# Altium PCB Arduino NG Ahuratus-PCB.PcbDoc (part 5 of 6)
Units mm, origin at the board's own origin, x right, y up, seen from the top; angles counter-clockwise.
Board outline 69 x 53.5 mm, 2 copper layers (Top Layer, Bottom Layer); 37 components, 49 nets, 193 pads, 40 vias.
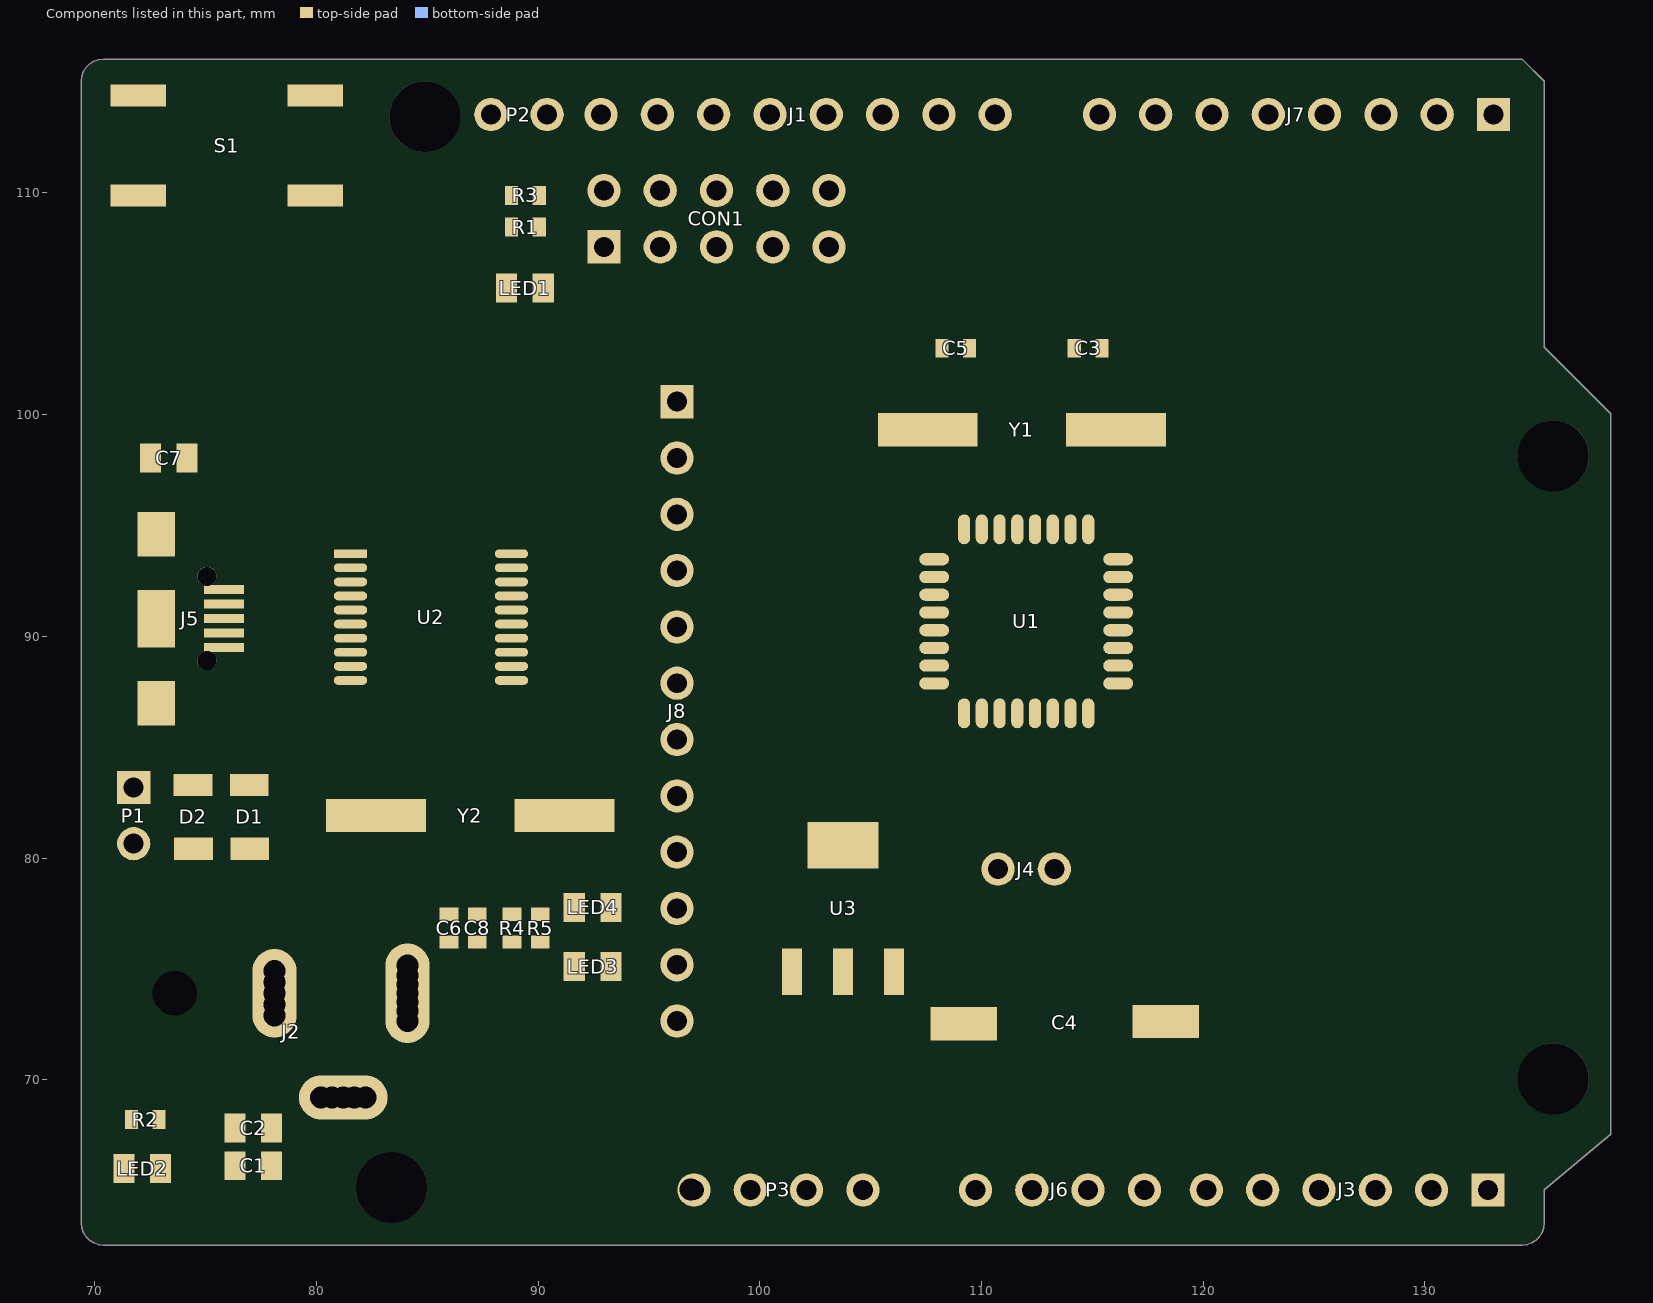
[diagram p5: the components of this part, seen from the top]

## Via types
v1: diameter 1.27, hole 0.711, Top Layer to Bottom Layer, 40 vias

## Nets (pads, with @x,y where several pads share a name; then routed paths per layer and width w, separated by ;. In a path a pad name is that pad's centre, name@x,y a point inside that pad or via, vN(x,y) a via of type N, cw(c..) or ccw(c..) an arc to the next point about the centre after c; other vN are vias at no path point) (continued)
copper on no net: (continued)
  Bottom Layer w0.051: 116.383,102.972 117.551,102.972 ; 116.383,103.022 117.551,103.022 ; 116.383,103.073 117.5,103.073 ; 116.383,103.124 117.5,103.124 ; 116.383,103.175 117.5,103.175 ; 116.383,103.226 117.5,103.226 ; 116.383,103.276 117.551,103.276 ; 116.383,103.327 117.551,103.327 ; 116.434,98.095 116.942,98.095 ; 116.434,98.146 116.942,98.146 ; 116.434,98.196 116.891,98.196 ; 116.434,98.247 116.891,98.247 ; 116.434,98.298 116.891,98.298 ; 116.434,98.349 116.891,98.349 ; 116.434,98.4 116.891,98.4 ; 116.434,98.45 116.891,98.45 ; 116.434,98.501 116.891,98.501 ; 116.434,98.552 116.891,98.552 ; 116.434,98.603 116.891,98.603 ; 116.434,98.654 116.891,98.654 ; 116.434,98.704 116.891,98.704 ; 116.434,98.755 116.891,98.755 ; 116.434,98.806 116.891,98.806 ; 116.434,98.857 116.942,98.857 ; 116.434,98.908 116.942,98.908 ; 116.434,98.958 116.942,98.958 ; 116.434,102.565 117.602,102.565 ; 116.434,102.616 117.602,102.616 ; 116.434,102.667 117.551,102.667 ; 116.434,102.718 117.551,102.718 ; 116.434,102.768 117.551,102.768 ; 116.434,102.819 117.551,102.819 ; 116.434,102.87 117.551,102.87 ; 116.434,102.921 117.551,102.921 ; 116.434,103.378 117.551,103.378 ; 116.434,103.429 117.551,103.429 ; 116.434,103.48 117.551,103.48 ; 116.434,103.53 117.551,103.53 ; 116.434,103.581 117.551,103.581 ; 116.434,103.632 117.602,103.632 ; 116.434,103.683 117.602,103.683 ; 116.484,97.942 116.992,97.942 ; 116.484,97.993 116.992,97.993 ; 116.484,98.044 116.942,98.044 ; 116.484,99.009 116.992,99.009 ; 116.484,99.06 116.992,99.06 ; 116.484,102.362 117.704,102.362 ; 116.484,102.413 117.653,102.413 ; 116.484,102.464 117.653,102.464 ; 116.484,102.514 117.602,102.514 ; 116.484,103.734 117.602,103.734 ; 116.484,103.784 117.653,103.784 ; 116.484,103.835 117.653,103.835 ; 116.484,103.886 117.704,103.886 ; 116.535,97.841 117.145,97.841 ; 116.535,97.892 117.043,97.892 ; 116.535,99.111 117.043,99.111 ; 116.535,99.162 117.145,99.162 ; 116.535,102.21 117.754,102.21 ; 116.535,102.26 117.754,102.26 ; 116.535,102.311 117.704,102.311 ; 116.535,103.937 117.704,103.937 ; 116.535,103.988 117.704,103.988 ; 116.535,104.038 117.754,104.038 ; 116.586,97.79 118.008,97.79 ; 116.586,99.212 117.958,99.212 ; 116.586,99.263 117.958,99.263 ; 116.586,102.057 117.856,102.057 ; 116.586,102.108 117.805,102.108 ; 116.586,102.159 117.805,102.159 ; 116.586,104.089 117.805,104.089 ; 116.586,104.14 117.805,104.14 ; 116.586,104.191 117.856,104.191 ; 116.637,97.739 117.958,97.739 ; 116.637,99.314 117.907,99.314 ; 116.637,101.956 117.907,101.956 ; 116.637,102.006 117.907,102.006 ; 116.637,104.242 117.907,104.242 ; 116.637,104.292 117.907,104.292 ; 116.637,104.343 117.958,104.343 ; 116.688,97.688 117.958,97.688 ; 116.688,99.365 117.856,99.365 ; 116.688,101.854 118.008,101.854 ; 116.688,101.905 117.958,101.905 ; 116.688,104.394 118.008,104.394 ; 116.688,104.445 118.059,104.445 ; 116.738,97.638 117.907,97.638 ; 116.738,99.416 117.805,99.416 ; 116.738,101.752 118.11,101.752 ; 116.738,101.803 118.059,101.803 ; 116.738,104.496 118.11,104.496 ; 116.789,97.587 117.805,97.587 ; 116.789,99.466 117.704,99.466 ; 116.789,101.651 118.212,101.651 ; 116.789,101.702 118.161,101.702 ; 116.789,104.546 118.161,104.546 ; 116.789,104.597 118.212,104.597 ; 116.84,97.536 117.754,97.536 ; 116.84,101.549 118.364,101.549 ; 116.84,101.6 118.313,101.6 ; 116.84,104.648 118.262,104.648 ; 116.84,104.699 118.364,104.699 ; 116.891,99.517 117.602,99.517 ; 116.891,101.498 118.466,101.498 ; 116.891,104.75 118.415,104.75 ; 116.942,97.485 117.653,97.485 ; 116.942,101.397 118.618,101.397 ; 116.942,101.448 118.516,101.448 ; 116.942,104.8 118.516,104.8 ; 116.942,104.851 118.618,104.851 ; 116.992,101.346 118.72,101.346 ; 116.992,104.902 118.72,104.902 ; 117.043,101.295 118.872,101.295 ; 117.043,104.953 118.872,104.953 ; 117.094,99.568 117.45,99.568 ; 117.094,101.194 119.38,101.194 ; 117.094,101.244 119.075,101.244 ; 117.094,105.004 119.024,105.004 ; 117.094,105.054 119.38,105.054 ; 117.145,97.434 117.45,97.434 ; 117.145,101.143 122.123,101.143 ; 117.145,105.105 122.123,105.105 ; 117.196,101.092 122.072,101.092 ; 117.196,105.156 122.072,105.156 ; 117.246,101.041 122.022,101.041 ; 117.246,105.207 122.022,105.207 ; 117.297,100.99 121.971,100.99 ; 117.297,105.258 121.971,105.258 ; 117.348,100.94 121.92,100.94 ; 117.348,105.308 121.92,105.308 ; 117.399,100.889 121.869,100.889 ; 117.399,105.359 121.869,105.359 ; 117.45,97.841 118.008,97.841 ; 117.45,99.162 118.008,99.162 ; 117.45,100.838 121.818,100.838 ; 117.45,105.41 121.768,105.41 ; 117.5,97.892 118.059,97.892 ; 117.5,99.111 118.059,99.111 ; 117.551,97.942 118.059,97.942 ; 117.551,99.06 118.059,99.06 ; 117.551,100.787 121.717,100.787 ; 117.551,105.461 121.717,105.461 ; 117.602,97.993 118.11,97.993 ; 117.602,98.044 118.11,98.044 ; 117.602,98.958 118.11,98.958 ; 117.602,99.009 118.059,99.009 ; 117.602,100.736 121.666,100.736 ; 117.602,105.512 121.666,105.512 ; 117.653,98.095 118.11,98.095 ; 117.653,98.146 118.11,98.146 ; 117.653,98.196 118.161,98.196 ; 117.653,98.247 118.161,98.247 ; 117.653,98.755 118.161,98.755 ; 117.653,98.806 118.11,98.806 ; 117.653,98.857 118.11,98.857 ; 117.653,98.908 118.11,98.908 ; 117.653,100.686 121.615,100.686 ; 117.653,105.562 121.564,105.562 ; 117.704,98.298 118.161,98.298 ; 117.704,98.349 118.161,98.349 ; 117.704,98.4 118.161,98.4 ; 117.704,98.45 118.161,98.45 ; 117.704,98.501 118.161,98.501 ; 117.704,98.552 118.161,98.552 ; 117.704,98.603 118.161,98.603 ; 117.704,98.654 118.161,98.654 ; 117.704,98.704 118.161,98.704 ; 117.754,100.635 121.514,100.635 ; 117.754,105.613 121.514,105.613 ; 117.805,100.584 121.463,100.584 ; 117.805,105.664 121.412,105.664 ; 117.907,100.533 121.361,100.533 ; 117.907,105.715 121.361,105.715 ; 117.958,105.766 121.26,105.766 ; 118.008,100.482 121.31,100.482 ; 118.059,100.432 121.209,100.432 ; 118.059,105.816 121.158,105.816 ; 118.161,100.381 121.107,100.381 ; 118.161,105.867 121.056,105.867 ; 118.262,105.918 120.955,105.918 ; 118.313,97.485 118.872,97.485 ; 118.313,97.536 118.872,97.536 ; 118.313,97.587 118.872,97.587 ; 118.313,97.638 118.923,97.638 ; 118.313,97.688 118.923,97.688 ; 118.313,97.739 118.974,97.739 ; 118.313,97.79 118.974,97.79 ; 118.313,97.841 119.024,97.841 ; 118.313,97.892 119.024,97.892 ; 118.313,97.942 119.075,97.942 ; 118.313,97.993 119.075,97.993 ; 118.313,98.044 119.126,98.044 ; 118.313,98.095 119.126,98.095 ; 118.313,98.146 119.177,98.146 ; 118.313,98.196 119.177,98.196 ; 118.313,98.247 118.72,98.247 ; 118.313,98.298 118.72,98.298 ; 118.313,98.349 118.72,98.349 ; 118.313,98.4 118.72,98.4 ; 118.313,98.45 118.72,98.45 ; 118.313,98.501 118.72,98.501 ; 118.313,98.552 118.72,98.552 ; 118.313,98.603 118.72,98.603 ; 118.313,98.654 118.72,98.654 ; 118.313,98.704 118.72,98.704 ; 118.313,98.755 118.72,98.755 ; 118.313,98.806 118.72,98.806 ; 118.313,98.857 118.72,98.857 ; 118.313,98.908 118.72,98.908 ; 118.313,98.958 118.72,98.958 ; 118.313,99.009 118.72,99.009 ; 118.313,99.06 118.72,99.06 ; 118.313,99.111 118.72,99.111 ; 118.313,99.162 118.72,99.162 ; 118.313,99.212 118.72,99.212 ; 118.313,99.263 118.72,99.263 ; 118.313,99.314 118.72,99.314 ; 118.313,99.365 118.72,99.365 ; 118.313,99.416 118.72,99.416 ; 118.313,99.466 118.72,99.466 ; 118.313,99.517 118.72,99.517 ; 118.313,100.33 121.006,100.33 ; 118.415,100.279 120.853,100.279 ; 118.415,105.969 120.802,105.969 ; 118.567,100.228 120.752,100.228 ; 118.567,106.02 120.65,106.02 ; 118.72,100.178 120.548,100.178 ; 118.72,106.07 120.498,106.07 ; 118.77,98.247 119.228,98.247 ; 118.77,98.298 119.228,98.298 ; 118.77,102.87 120.65,102.87 ; 118.77,102.921 120.65,102.921 ; 118.77,102.972 120.65,102.972 ; 118.77,103.022 120.65,103.022 ; 118.77,103.073 120.65,103.073 ; 118.77,103.124 120.65,103.124 ; 118.77,103.175 120.65,103.175 ; 118.77,103.226 120.65,103.226 ; 118.77,103.276 120.65,103.276 ; 118.77,103.327 120.65,103.327 ; 118.77,103.378 120.65,103.378 ; 118.77,103.429 120.65,103.429 ; 118.77,103.48 120.65,103.48 ; 118.77,103.53 120.65,103.53 ; 118.821,98.349 119.228,98.349 ; 118.821,98.4 119.278,98.4 ; 118.872,98.45 119.278,98.45 ; 118.872,98.501 119.329,98.501 ; 118.872,98.552 119.329,98.552 ; 118.923,98.603 119.38,98.603 ; 118.923,98.654 119.38,98.654 ; 118.923,106.121 120.244,106.121 ; 118.974,98.704 119.431,98.704 ; 118.974,98.755 119.431,98.755 ; 118.974,100.127 120.345,100.127 ; 119.024,98.806 119.888,98.806 ; 119.024,98.857 119.888,98.857 ; 119.075,98.908 119.888,98.908 ; 119.075,98.958 119.888,98.958 ; 119.126,99.009 119.888,99.009 ; 119.126,99.06 119.888,99.06 ; 119.177,99.111 119.888,99.111 ; 119.177,99.162 119.888,99.162 ; 119.228,99.212 119.888,99.212 ; 119.228,99.263 119.888,99.263 ; 119.228,99.314 119.888,99.314 ; 119.278,99.365 119.888,99.365 ; 119.278,99.416 119.888,99.416 ; 119.278,106.172 119.888,106.172 ; 119.329,99.466 119.888,99.466 ; 119.329,99.517 119.888,99.517 ; 119.38,100.076 119.99,100.076 ; 119.38,102.311 120.091,102.311 ; 119.38,102.362 120.091,102.362 ; 119.38,102.413 120.091,102.413 ; 119.38,102.464 120.091,102.464 ; 119.38,102.514 120.091,102.514 ; 119.38,102.565 120.091,102.565 ; 119.38,102.616 120.091,102.616 ; 119.38,102.667 120.091,102.667 ; 119.38,102.718 120.091,102.718 ; 119.38,102.768 120.091,102.768 ; 119.38,102.819 120.091,102.819 ; 119.38,103.581 120.091,103.581 ; 119.38,103.632 120.091,103.632 ; 119.38,103.683 120.091,103.683 ; 119.38,103.734 120.091,103.734 ; 119.38,103.784 120.091,103.784 ; 119.38,103.835 120.091,103.835 ; 119.38,103.886 120.091,103.886 ; 119.38,103.937 120.091,103.937 ; 119.38,103.988 120.091,103.988 ; 119.38,104.038 120.091,104.038 ; 119.38,104.089 120.091,104.089 ; 119.38,104.14 120.091,104.14 ; 119.482,97.485 119.888,97.485 ; 119.482,97.536 119.888,97.536 ; 119.482,97.587 119.888,97.587 ; 119.482,97.638 119.888,97.638 ; 119.482,97.688 119.888,97.688 ; 119.482,97.739 119.888,97.739 ; 119.482,97.79 119.888,97.79 ; 119.482,97.841 119.888,97.841 ; 119.482,97.892 119.888,97.892 ; 119.482,97.942 119.888,97.942 ; 119.482,97.993 119.888,97.993 ; 119.482,98.044 119.888,98.044 ; 119.482,98.095 119.888,98.095 ; 119.482,98.146 119.888,98.146 ; 119.482,98.196 119.888,98.196 ; 119.482,98.247 119.888,98.247 ; 119.482,98.298 119.888,98.298 ; 119.482,98.349 119.888,98.349 ; 119.482,98.4 119.888,98.4 ; 119.482,98.45 119.888,98.45 ; 119.482,98.501 119.888,98.501 ; 119.482,98.552 119.888,98.552 ; 119.482,98.603 119.888,98.603 ; 119.482,98.654 119.888,98.654 ; 119.482,98.704 119.888,98.704 ; 119.482,98.755 119.888,98.755 ; 119.786,105.054 122.174,105.054 ; 119.99,101.194 122.174,101.194 ; 120.142,105.004 122.225,105.004 ; 120.244,97.485 121.615,97.485 ; 120.244,97.536 121.615,97.536 ; 120.244,97.587 121.615,97.587 ; 120.244,97.638 121.615,97.638 ; 120.244,97.688 121.615,97.688 ; 120.244,97.739 121.615,97.739 ; 120.244,97.79 121.615,97.79 ; 120.244,99.212 121.615,99.212 ; 120.244,99.263 121.615,99.263 ; 120.244,99.314 121.615,99.314 ; 120.244,99.365 121.615,99.365 ; 120.244,99.416 121.615,99.416 ; 120.244,99.466 121.615,99.466 ; 120.244,99.517 121.615,99.517 ; 120.244,101.244 122.225,101.244 ; 120.345,104.953 122.276,104.953 ; 120.447,101.295 122.276,101.295 ; 120.498,104.902 122.326,104.902 ; 120.548,101.346 122.276,101.346 ; 120.599,104.851 122.377,104.851 ; 120.65,101.397 122.326,101.397 ; 120.701,97.841 121.158,97.841 ; 120.701,97.892 121.158,97.892 ; 120.701,97.942 121.158,97.942 ; 120.701,97.993 121.158,97.993 ; 120.701,98.044 121.158,98.044 ; 120.701,98.095 121.158,98.095 ; 120.701,98.146 121.158,98.146 ; 120.701,98.196 121.158,98.196 ; 120.701,98.247 121.158,98.247 ; 120.701,98.298 121.158,98.298 ; 120.701,98.349 121.158,98.349 ; 120.701,98.4 121.158,98.4 ; 120.701,98.45 121.158,98.45 ; 120.701,98.501 121.158,98.501 ; 120.701,98.552 121.158,98.552 ; 120.701,98.603 121.158,98.603 ; 120.701,98.654 121.158,98.654 ; 120.701,98.704 121.158,98.704 ; 120.701,98.755 121.158,98.755 ; 120.701,98.806 121.158,98.806 ; 120.701,98.857 121.158,98.857 ; 120.701,98.908 121.158,98.908 ; 120.701,98.958 121.158,98.958 ; 120.701,99.009 121.158,99.009 ; 120.701,99.06 121.158,99.06 ; 120.701,99.111 121.158,99.111 ; 120.701,99.162 121.158,99.162 ; 120.701,104.8 122.428,104.8 ; 120.752,101.448 122.377,101.448 ; 120.802,104.75 122.428,104.75 ; 120.853,101.498 122.428,101.498 ; 120.853,104.699 122.479,104.699 ; 120.904,101.549 122.479,101.549 ; 120.955,101.6 122.479,101.6 ; 120.955,104.648 122.53,104.648 ; 121.006,104.597 122.58,104.597 ; 121.056,101.651 122.53,101.651 ; 121.107,101.702 122.58,101.702 ; 121.107,104.546 122.631,104.546 ; 121.158,101.752 122.631,101.752 ; 121.158,104.496 122.631,104.496 ; 121.209,101.803 122.631,101.803 ; 121.209,104.445 122.682,104.445 ; 121.26,101.854 122.682,101.854 ; 121.26,104.394 122.733,104.394 ; 121.31,101.905 122.733,101.905 ; 121.31,104.343 122.784,104.343 ; 121.361,101.956 122.733,101.956 ; 121.361,104.292 122.784,104.292 ; 121.412,102.006 122.784,102.006 ; 121.412,102.057 122.834,102.057 ; 121.412,104.242 122.834,104.242 ; 121.463,102.108 122.834,102.108 ; 121.463,104.191 124.257,104.191 ; 121.514,102.159 124.206,102.159 ; 121.514,104.14 124.206,104.14 ; 121.564,102.21 124.155,102.21 ; 121.564,104.089 124.155,104.089 ; 121.615,102.26 124.104,102.26 ; 121.615,102.311 124.104,102.311 ; 121.615,103.988 124.104,103.988 ; 121.615,104.038 124.104,104.038 ; 121.666,102.362 124.054,102.362 ; 121.666,103.937 124.054,103.937 ; 121.717,102.413 124.003,102.413 ; 121.717,103.886 124.003,103.886 ; 121.768,102.464 123.952,102.464 ; 121.768,102.514 123.952,102.514 ; 121.768,103.784 123.952,103.784 ; 121.768,103.835 123.952,103.835 ; 121.818,102.565 123.901,102.565 ; 121.818,103.734 123.901,103.734 ; 121.869,102.616 123.85,102.616 ; 121.869,102.667 123.85,102.667 ; 121.869,103.683 123.85,103.683 ; 121.92,102.718 123.8,102.718 ; 121.92,103.581 123.8,103.581 ; 121.92,103.632 123.85,103.632 ; 121.971,97.942 122.428,97.942 ; 121.971,97.993 122.428,97.993 ; 121.971,98.044 122.428,98.044 ; 121.971,98.095 122.428,98.095 ; 121.971,98.146 122.428,98.146 ; 121.971,98.196 122.428,98.196 ; 121.971,98.247 122.428,98.247 ; 121.971,98.298 122.428,98.298 ; 121.971,98.349 122.428,98.349 ; 121.971,98.4 122.428,98.4 ; 121.971,98.45 122.428,98.45 ; 121.971,98.501 122.428,98.501 ; 121.971,98.552 122.428,98.552 ; 121.971,98.603 122.428,98.603 ; 121.971,98.654 122.428,98.654 ; 121.971,98.704 122.428,98.704 ; 121.971,98.755 122.428,98.755 ; 121.971,98.806 122.428,98.806 ; 121.971,98.857 122.428,98.857 ; 121.971,98.908 122.428,98.908 ; 121.971,98.958 122.428,98.958 ; 121.971,99.009 122.428,99.009 ; 121.971,99.06 122.428,99.06 ; 121.971,99.111 122.428,99.111 ; 121.971,99.162 122.428,99.162 ; 121.971,99.212 122.428,99.212 ; 121.971,99.263 122.428,99.263 ; 121.971,99.314 122.428,99.314 ; 121.971,99.365 122.428,99.365 ; 121.971,99.416 122.428,99.416 ; 121.971,99.466 122.428,99.466 ; 121.971,99.517 122.428,99.517 ; 121.971,102.768 123.749,102.768 ; 121.971,102.819 123.749,102.819 ; 121.971,103.53 123.749,103.53 ; 122.022,97.841 122.53,97.841 ; 122.022,97.892 122.479,97.892 ; 122.022,102.87 123.698,102.87 ; 122.022,102.921 123.698,102.921 ; 122.022,103.429 123.698,103.429 ; 122.022,103.48 123.698,103.48 ; 122.072,97.739 123.444,97.739 ; 122.072,97.79 123.495,97.79 ; 122.072,102.972 123.647,102.972 ; 122.072,103.378 123.647,103.378 ; 122.123,97.688 123.444,97.688 ; 122.123,103.022 123.596,103.022 ; 122.123,103.073 123.596,103.073 ; 122.123,103.276 123.596,103.276 ; 122.123,103.327 123.647,103.327 ; 122.174,97.638 123.393,97.638 ; 122.174,103.124 123.546,103.124 ; 122.174,103.175 123.546,103.175 ; 122.174,103.226 123.546,103.226 ; 122.225,97.587 123.342,97.587 ; 122.276,97.536 123.241,97.536 ; 122.377,97.485 123.139,97.485 ; 122.58,97.434 122.936,97.434 ; 122.885,102.057 124.308,102.057 ; 122.885,102.108 124.257,102.108 ; 122.885,104.242 124.308,104.242 ; 122.936,102.006 124.308,102.006 ; 122.936,104.292 124.358,104.292 ; 122.936,104.343 124.409,104.343 ; 122.987,97.841 123.495,97.841 ; 122.987,101.905 124.409,101.905 ; 122.987,101.956 124.358,101.956 ; 122.987,104.394 124.46,104.394 ; 123.038,97.892 123.495,97.892 ; 123.038,97.942 123.546,97.942 ; 123.038,101.854 124.46,101.854 ; 123.038,104.445 124.511,104.445 ; 123.088,97.993 123.546,97.993 ; 123.088,98.044 123.546,98.044 ; 123.088,98.095 123.546,98.095 ; 123.088,98.146 123.546,98.146 ; 123.088,98.196 123.546,98.196 ; 123.088,98.247 123.546,98.247 ; 123.088,98.298 123.546,98.298 ; 123.088,98.349 123.546,98.349 ; 123.088,98.4 123.546,98.4 ; 123.088,98.45 123.546,98.45 ; 123.088,98.501 123.546,98.501 ; 123.088,98.552 123.546,98.552 ; 123.088,98.603 123.546,98.603 ; 123.088,98.654 123.546,98.654 ; 123.088,98.704 123.546,98.704 ; 123.088,98.755 123.546,98.755 ; 123.088,98.806 123.546,98.806 ; 123.088,98.857 123.546,98.857 ; 123.088,98.908 123.546,98.908 ; 123.088,98.958 123.546,98.958 ; 123.088,99.009 123.546,99.009 ; 123.088,99.06 123.546,99.06 ; 123.088,99.111 123.546,99.111 ; 123.088,99.162 123.546,99.162 ; 123.088,99.212 123.546,99.212 ; 123.088,99.263 123.546,99.263 ; 123.088,99.314 123.546,99.314 ; 123.088,99.365 123.546,99.365 ; 123.088,99.416 123.546,99.416 ; 123.088,99.466 123.546,99.466 ; 123.088,99.517 123.546,99.517 ; 123.088,101.752 124.562,101.752 ; 123.088,101.803 124.511,101.803 ; 123.088,104.496 124.562,104.496 ; 123.088,104.546 124.663,104.546 ; 123.139,101.702 124.612,101.702 ; 123.139,104.597 124.714,104.597 ; 123.19,101.651 124.663,101.651 ; 123.19,104.648 124.765,104.648 ; 123.241,101.549 124.816,101.549 ; 123.241,101.6 124.765,101.6 ; 123.241,104.699 124.866,104.699 ; 123.292,101.498 124.866,101.498 ; 123.292,104.75 124.917,104.75 ; 123.292,104.8 125.019,104.8 ; 123.342,101.448 124.968,101.448 ; 123.342,104.851 125.12,104.851 ; 123.393,101.397 125.07,101.397 ; 123.393,104.902 125.222,104.902 ; 123.444,101.295 125.273,101.295 ; 123.444,101.346 125.171,101.346 ; 123.444,104.953 125.374,104.953 ; 123.495,101.244 125.476,101.244 ; 123.495,105.004 125.578,105.004 ; 123.546,101.194 125.73,101.194 ; 123.546,105.054 125.933,105.054 ; 123.596,101.143 128.575,101.143 ; 123.596,105.105 128.575,105.105 ; 123.647,101.092 128.524,101.092 ; 123.647,105.156 128.524,105.156 ; 123.698,101.041 128.473,101.041 ; 123.698,105.207 128.473,105.207 ; 123.749,98.146 124.257,98.146 ; 123.749,98.196 124.257,98.196 ; 123.749,98.247 124.206,98.247 ; 123.749,98.298 124.206,98.298 ; 123.749,98.349 124.206,98.349 ; 123.749,98.4 124.206,98.4 ; 123.749,98.45 124.206,98.45 ; 123.749,98.501 124.206,98.501 ; 123.749,98.552 124.206,98.552 ; 123.749,98.603 124.206,98.603 ; 123.749,98.654 124.206,98.654 ; 123.749,98.704 124.206,98.704 ; 123.749,98.755 124.206,98.755 ; 123.749,98.806 124.257,98.806 ; 123.749,98.857 124.257,98.857 ; 123.749,98.908 124.257,98.908 ; 123.749,100.99 128.422,100.99 ; 123.749,105.258 128.422,105.258 ; 123.8,97.993 124.358,97.993 ; 123.8,98.044 124.308,98.044 ; 123.8,98.095 124.257,98.095 ; 123.8,98.958 124.308,98.958 ; 123.8,99.009 124.308,99.009 ; 123.8,99.06 124.358,99.06 ; 123.8,100.94 128.372,100.94 ; 123.8,105.308 128.372,105.308 ; 123.85,97.942 124.409,97.942 ; 123.85,99.111 124.46,99.111 ; 123.85,99.162 124.562,99.162 ; 123.85,100.889 128.321,100.889 ; 123.85,105.359 128.321,105.359 ; 123.901,97.841 124.612,97.841 ; 123.901,97.892 124.46,97.892 ; 123.901,99.212 125.374,99.212 ; 123.901,100.838 128.27,100.838 ; 123.952,97.79 125.374,97.79 ; 123.952,99.263 125.374,99.263 ; 123.952,105.41 128.27,105.41 ; 124.003,97.739 125.374,97.739 ; 124.003,99.314 125.374,99.314 ; 124.003,100.787 128.168,100.787 ; 124.003,105.461 128.219,105.461 ; 124.054,97.688 125.374,97.688 ; 124.054,99.365 125.374,99.365 ; 124.054,100.736 128.118,100.736 ; 124.054,105.512 128.118,105.512 ; 124.104,97.638 125.374,97.638 ; 124.104,100.686 128.067,100.686 ; 124.155,99.416 125.374,99.416 ; 124.155,105.562 128.067,105.562 ; 124.206,97.587 125.374,97.587 ; 124.206,99.466 125.374,99.466 ; 124.206,100.635 127.965,100.635 ; 124.206,105.613 127.965,105.613 ; 124.257,100.584 127.914,100.584 ; 124.308,97.536 125.374,97.536 ; 124.308,105.664 127.914,105.664 ; 124.358,100.533 127.813,100.533 ; 124.358,105.715 127.864,105.715 ; 124.409,99.517 125.374,99.517 ; 124.409,100.482 127.711,100.482 ; 124.46,105.766 127.762,105.766 ; 124.511,97.485 125.374,97.485 ; 124.511,100.432 127.66,100.432 ; 124.562,105.816 127.66,105.816 ; 124.612,100.381 127.559,100.381 ; 124.663,105.867 127.559,105.867 ; 124.714,100.33 127.406,100.33 ; 124.765,105.918 127.457,105.918 ; 124.866,100.279 127.305,100.279 ; 124.917,97.841 125.374,97.841 ; 124.917,97.892 125.374,97.892 ; 124.917,97.942 125.374,97.942 ; 124.917,97.993 125.374,97.993 ; 124.917,98.044 125.374,98.044 ; 124.917,98.095 125.374,98.095 ; 124.917,98.146 125.374,98.146 ; 124.917,98.196 125.374,98.196 ; 124.917,98.247 125.374,98.247 ; 124.917,98.298 125.374,98.298 ; 124.917,98.349 125.374,98.349 ; 124.917,98.4 125.374,98.4 ; 124.917,98.45 125.374,98.45 ; 124.917,98.501 125.374,98.501 ; 124.917,98.552 125.374,98.552 ; 124.917,98.603 125.374,98.603 ; 124.917,98.654 125.374,98.654 ; 124.917,98.704 125.374,98.704 ; 124.917,98.755 125.374,98.755 ; 124.917,98.806 125.374,98.806 ; 124.917,98.857 125.374,98.857 ; 124.917,98.908 125.374,98.908 ; 124.917,98.958 125.374,98.958 ; 124.917,99.009 125.374,99.009 ; 124.917,99.06 125.374,99.06 ; 124.917,99.111 125.374,99.111 ; 124.917,99.162 125.374,99.162 ; 124.917,105.969 127.305,105.969 ; 124.968,100.228 127.152,100.228 ; 125.07,102.921 127.051,102.921 ; 125.07,102.972 127.051,102.972 ; 125.07,103.022 127.051,103.022 ; 125.07,103.073 127.051,103.073 ; 125.07,103.124 127.051,103.124 ; 125.07,103.175 127.051,103.175 ; 125.07,103.226 127.051,103.226 ; 125.07,103.276 127.051,103.276 ; 125.07,103.327 127.051,103.327 ; 125.07,103.378 127.051,103.378 ; 125.07,103.429 127.051,103.429 ; 125.07,103.48 127.051,103.48 ; 125.07,106.02 127.152,106.02 ; 125.12,103.53 127.051,103.53 ; 125.171,100.178 127,100.178 ; 125.222,106.07 127,106.07 ; 125.374,100.127 126.746,100.127 ; 125.476,106.121 126.797,106.121 ; 125.527,97.485 126.086,97.485 ; 125.578,97.536 126.086,97.536 ; 125.578,97.587 126.086,97.587 ; 125.628,97.638 126.136,97.638 ; 125.628,97.688 126.136,97.688 ; 125.679,97.739 126.187,97.739 ; 125.679,97.79 126.187,97.79 ; 125.679,98.857 126.187,98.857 ; 125.679,98.908 126.187,98.908 ; 125.679,98.958 126.187,98.958 ; 125.679,99.009 126.187,99.009 ; 125.679,99.06 126.187,99.06 ; 125.679,99.111 126.238,99.111 ; 125.73,97.841 126.238,97.841 ; 125.73,97.892 126.238,97.892 ; 125.73,98.704 126.289,98.704 ; 125.73,98.755 126.238,98.755 ; 125.73,98.806 126.187,98.806 ; 125.73,99.162 126.34,99.162 ; 125.73,99.212 127.152,99.212 ; 125.73,100.076 126.34,100.076 ; 125.781,97.942 126.289,97.942 ; 125.781,97.993 126.289,97.993 ; 125.781,98.654 126.441,98.654 ; 125.781,99.263 127.152,99.263 ; 125.781,99.314 127.152,99.314 ; 125.832,98.044 126.34,98.044 ; 125.832,98.095 126.34,98.095 ; 125.832,98.603 127.152,98.603 ; 125.832,99.365 127.152,99.365 ; 125.832,106.172 126.441,106.172 ; 125.882,98.146 126.34,98.146 ; 125.882,98.196 126.39,98.196 ; 125.882,98.552 127.152,98.552 ; 125.933,98.247 126.441,98.247 ; 125.933,98.298 126.644,98.298 ; 125.933,98.501 127.152,98.501 ; 125.933,99.416 127.152,99.416 ; 125.984,98.349 127.152,98.349 ; 125.984,99.466 127.152,99.466 ; 126.035,98.4 127.152,98.4 ; 126.086,98.45 127.152,98.45 ; 126.136,99.517 127.152,99.517 ; 126.34,101.194 128.626,101.194 ; 126.34,105.054 128.626,105.054 ; 126.644,101.244 128.626,101.244 ; 126.695,97.485 127.102,97.485 ; 126.695,97.536 127.152,97.536 ; 126.695,97.587 127.152,97.587 ; 126.695,97.638 127.152,97.638 ; 126.695,97.688 127.152,97.688 ; 126.695,97.739 127.152,97.739 ; 126.695,97.79 127.152,97.79 ; 126.695,97.841 127.152,97.841 ; 126.695,97.892 127.152,97.892 ; 126.695,97.942 127.152,97.942 ; 126.695,97.993 127.152,97.993 ; 126.695,98.044 127.152,98.044 ; 126.695,98.095 127.152,98.095 ; 126.695,98.146 127.152,98.146 ; 126.695,98.196 127.152,98.196 ; 126.695,98.247 127.152,98.247 ; 126.695,98.298 127.152,98.298 ; 126.695,98.654 127.152,98.654 ; 126.695,98.704 127.152,98.704 ; 126.695,98.755 127.152,98.755 ; 126.695,98.806 127.152,98.806 ; 126.695,98.857 127.152,98.857 ; 126.695,98.908 127.152,98.908 ; 126.695,98.958 127.152,98.958 ; 126.695,99.009 127.152,99.009 ; 126.695,99.06 127.152,99.06 ; 126.695,99.111 127.152,99.111 ; 126.695,99.162 127.152,99.162 ; 126.695,105.004 128.626,105.004 ; 126.848,101.295 128.676,101.295 ; 126.848,104.953 128.676,104.953 ; 127,101.346 128.727,101.346 ; 127,104.902 128.727,104.902 ; 127.102,101.397 128.778,101.397 ; 127.102,104.851 128.778,104.851 ; 127.203,101.448 128.778,101.448 ; 127.203,104.8 128.778,104.8 ; 127.254,101.498 128.829,101.498 ; 127.305,97.485 127.762,97.485 ; 127.305,97.536 127.813,97.536 ; 127.305,97.587 127.813,97.587 ; 127.305,104.75 128.829,104.75 ; 127.356,97.638 127.813,97.638 ; 127.356,97.688 127.864,97.688 ; 127.356,97.739 127.864,97.739 ; 127.356,101.549 128.88,101.549 ; 127.356,104.699 128.88,104.699 ; 127.406,97.79 127.864,97.79 ; 127.406,97.841 127.864,97.841 ; 127.406,97.892 129.032,97.892 ; 127.406,97.942 129.032,97.942 ; 127.406,101.6 128.88,101.6 ; 127.457,97.993 128.981,97.993 ; 127.457,98.044 128.981,98.044 ; 127.457,98.095 128.981,98.095 ; 127.457,104.648 128.88,104.648 ; 127.508,98.146 128.93,98.146 ; 127.508,98.196 128.93,98.196 ; 127.508,98.247 128.016,98.247 ; 127.508,101.651 128.93,101.651 ; 127.508,104.597 128.93,104.597 ; 127.559,98.298 128.016,98.298 ; 127.559,98.349 128.016,98.349 ; 127.559,98.4 128.067,98.4 ; 127.559,101.702 128.93,101.702 ; 127.559,104.546 128.93,104.546 ; 127.61,98.45 128.067,98.45 ; 127.61,98.501 128.067,98.501 ; 127.61,98.552 128.067,98.552 ; 127.61,98.603 128.118,98.603 ; 127.61,101.752 128.981,101.752 ; 127.61,104.496 128.981,104.496 ; 127.66,98.654 128.118,98.654 ; 127.66,98.704 128.118,98.704 ; 127.66,98.755 128.168,98.755 ; 127.66,101.803 128.981,101.803 ; 127.66,104.445 129.032,104.445 ; 127.711,98.806 128.168,98.806 ; 127.711,98.857 128.168,98.857 ; 127.711,98.908 128.168,98.908 ; 127.711,101.854 129.032,101.854 ; 127.711,104.394 129.032,104.394 ; 127.762,98.958 128.219,98.958 ; 127.762,99.009 128.219,99.009 ; 127.762,99.06 128.676,99.06 ; 127.762,101.905 129.032,101.905 ; 127.762,104.343 129.083,104.343 ; 127.813,99.111 128.676,99.111 ; 127.813,99.162 128.626,99.162 ; 127.813,99.212 128.626,99.212 ; 127.813,99.263 128.626,99.263 ; 127.813,101.956 129.083,101.956 ; 127.813,102.006 129.083,102.006 ; 127.813,104.242 129.083,104.242 ; 127.813,104.292 129.083,104.292 ; 127.864,99.314 128.575,99.314 ; 127.864,99.365 128.575,99.365 ; 127.864,99.416 128.575,99.416 ; 127.864,102.057 129.134,102.057 ; 127.864,104.191 129.134,104.191 ; 127.914,99.466 128.524,99.466 ; 127.914,99.517 128.524,99.517 ; 127.914,102.108 129.134,102.108 ; 127.914,102.159 129.134,102.159 ; 127.914,104.089 129.134,104.089 ; 127.914,104.14 129.134,104.14 ; 127.965,102.21 129.184,102.21 ; 127.965,102.26 129.184,102.26 ; 127.965,104.038 129.184,104.038 ; 128.016,102.311 129.184,102.311 ; 128.016,102.362 129.235,102.362 ; 128.016,103.886 129.235,103.886 ; 128.016,103.937 129.184,103.937 ; 128.016,103.988 129.184,103.988 ; 128.067,102.413 129.235,102.413 ; 128.067,102.464 129.235,102.464 ; 128.067,103.784 129.235,103.784 ; 128.067,103.835 129.235,103.835 ; 128.118,102.514 129.235,102.514 ; 128.118,102.565 129.286,102.565 ; 128.118,102.616 129.286,102.616 ; 128.118,103.632 129.286,103.632 ; 128.118,103.683 129.286,103.683 ; 128.118,103.734 129.235,103.734 ; 128.168,102.667 129.286,102.667 ; 128.168,102.718 129.286,102.718 ; 128.168,102.768 129.286,102.768 ; 128.168,102.819 129.286,102.819 ; 128.168,102.87 129.286,102.87 ; 128.168,102.921 129.337,102.921 ; 128.168,102.972 129.337,102.972 ; 128.168,103.276 129.337,103.276 ; 128.168,103.327 129.337,103.327 ; 128.168,103.378 129.286,103.378 ; 128.168,103.429 129.286,103.429 ; 128.168,103.48 129.286,103.48 ; 128.168,103.53 129.286,103.53 ; 128.168,103.581 129.286,103.581 ; 128.219,103.022 129.337,103.022 ; 128.219,103.073 129.337,103.073 ; 128.219,103.124 129.337,103.124 ; 128.219,103.175 129.337,103.175 ; 128.219,103.226 129.337,103.226 ; 128.27,98.908 128.727,98.908 ; 128.27,98.958 128.676,98.958 ; 128.27,99.009 128.676,99.009 ; 128.321,98.704 128.778,98.704 ; 128.321,98.755 128.778,98.755 ; 128.321,98.806 128.727,98.806 ; 128.321,98.857 128.727,98.857 ; 128.372,98.552 128.829,98.552 ; 128.372,98.603 128.829,98.603 ; 128.372,98.654 128.778,98.654 ; 128.422,98.349 128.88,98.349 ; 128.422,98.4 128.88,98.4 ; 128.422,98.45 128.88,98.45 ; 128.422,98.501 128.829,98.501 ; 128.473,98.247 128.93,98.247 ; 128.473,98.298 128.88,98.298 ; 128.575,97.841 129.032,97.841 ; 128.626,97.688 129.083,97.688 ; 128.626,97.739 129.083,97.739 ; 128.626,97.79 129.083,97.79 ; 128.676,97.536 129.134,97.536 ; 128.676,97.587 129.134,97.587 ; 128.676,97.638 129.083,97.638 ; 128.727,97.485 129.134,97.485
  Bottom Layer w0.076: 78.359,102.464 78.892,102.464 ; 78.359,102.54 78.892,102.54 ; 78.359,102.616 78.816,102.616 ; 78.359,102.692 78.816,102.692 ; 78.359,102.768 78.816,102.768 ; 78.359,102.845 78.816,102.845 ; 78.359,102.921 78.816,102.921 ; 78.359,102.997 78.816,102.997 ; 78.359,103.073 78.816,103.073 ; 78.359,103.149 78.816,103.149 ; 78.359,103.226 78.816,103.226 ; 78.359,103.302 78.816,103.302 ; 78.359,103.378 78.74,103.378 ; 78.359,103.454 78.74,103.454 ; 78.359,103.53 78.74,103.53 ; 78.359,103.607 78.74,103.607 ; 78.359,103.683 78.74,103.683 ; 78.359,103.759 78.74,103.759 ; 78.359,103.835 78.816,103.835 ; 78.359,103.911 78.816,103.911 ; 78.359,103.988 78.816,103.988 ; 78.359,104.064 78.816,104.064 ; 78.359,104.14 78.816,104.14 ; 78.359,104.216 78.816,104.216 ; 78.359,104.292 78.816,104.292 ; 78.435,102.083 78.969,102.083 ; 78.435,102.159 78.969,102.159 ; 78.435,102.235 78.969,102.235 ; 78.435,102.311 78.892,102.311 ; 78.435,102.387 78.892,102.387 ; 78.435,104.369 78.892,104.369 ; 78.435,104.445 78.892,104.445 ; 78.435,104.521 78.892,104.521 ; 78.435,104.597 78.892,104.597 ; 78.435,104.673 78.969,104.673 ; 78.511,101.93 79.045,101.93 ; 78.511,102.006 79.045,102.006 ; 78.511,104.75 78.969,104.75 ; 78.511,104.826 78.969,104.826 ; 78.588,101.625 79.121,101.625 ; 78.588,101.702 79.045,101.702 ; 78.588,101.778 79.045,101.778 ; 78.588,101.854 79.045,101.854 ; 78.588,104.902 79.045,104.902 ; 78.588,104.978 79.045,104.978 ; 78.588,105.054 79.045,105.054 ; 78.664,101.473 79.197,101.473 ; 78.664,101.549 79.121,101.549 ; 78.664,105.131 79.045,105.131 ; 78.664,105.207 79.121,105.207 ; 78.664,105.283 79.121,105.283 ; 78.74,101.321 79.273,101.321 ; 78.74,101.397 79.197,101.397 ; 78.74,105.359 79.197,105.359 ; 78.74,105.435 79.197,105.435 ; 78.816,101.168 79.35,101.168 ; 78.816,101.244 79.273,101.244 ; 78.816,105.512 79.273,105.512 ; 78.816,105.588 79.273,105.588 ; 78.892,100.94 79.502,100.94 ; 78.892,101.016 79.426,101.016 ; 78.892,101.092 79.426,101.092 ; 78.892,105.664 79.35,105.664 ; 78.892,105.74 79.35,105.74 ; 78.969,100.863 79.502,100.863 ; 78.969,105.816 79.426,105.816 ; 78.969,105.893 79.426,105.893 ; 79.045,100.711 79.654,100.711 ; 79.045,100.787 79.578,100.787 ; 79.045,105.969 79.502,105.969 ; 79.045,106.045 79.578,106.045 ; 79.121,100.635 79.654,100.635 ; 79.121,106.121 79.578,106.121 ; 79.197,100.482 79.807,100.482 ; 79.197,100.559 79.731,100.559 ; 79.197,106.197 79.654,106.197 ; 79.197,106.274 79.731,106.274 ; 79.273,100.406 79.883,100.406 ; 79.273,106.35 79.731,106.35 ; 79.35,100.254 79.502,100.254 ; 79.35,100.33 79.959,100.33 ; 79.35,106.426 79.807,106.426 ; 79.35,106.502 79.883,106.502 ; 79.426,106.578 79.959,106.578 ; 79.502,106.655 80.035,106.655 ; 79.578,100.254 79.959,100.254 ; 79.578,106.731 80.112,106.731 ; 79.654,100.178 80.035,100.178 ; 79.654,106.807 80.188,106.807 ; 79.731,100.025 79.959,100.025 ; 79.731,100.101 79.959,100.101 ; 79.731,106.883 80.264,106.883 ; 79.807,99.949 80.035,99.949 ; 79.807,106.959 80.34,106.959 ; 79.883,107.036 80.416,107.036 ; 79.959,99.797 80.188,99.797 ; 79.959,99.873 80.112,99.873 ; 79.959,107.112 80.493,107.112 ; 80.035,100.025 80.112,100.025 ; 80.035,100.101 80.112,100.101 ; 80.035,107.188 80.645,107.188 ; 80.112,99.72 80.34,99.72 ; 80.112,107.264 80.721,107.264 ; 80.188,99.644 80.416,99.644 ; 80.264,99.568 80.493,99.568 ; 80.264,107.34 80.874,107.34 ; 80.34,99.492 80.645,99.492 ; 80.34,107.417 80.95,107.417 ; 80.416,99.416 80.721,99.416 ; 80.416,107.493 81.102,107.493 ; 80.569,99.339 80.797,99.339 ; 80.569,107.569 81.255,107.569 ; 80.645,99.263 80.95,99.263 ; 80.645,107.645 81.407,107.645 ; 80.797,99.187 81.026,99.187 ; 80.797,102.997 81.483,102.997 ; 80.797,103.073 81.026,103.073 ; 80.797,103.149 81.026,103.149 ; 80.797,103.226 81.102,103.226 ; 80.797,103.302 81.483,103.302 ; 80.797,107.721 81.559,107.721 ; 80.874,99.111 81.026,99.111 ; 80.874,102.235 81.483,102.235 ; 80.874,102.311 81.407,102.311 ; 80.874,102.387 81.407,102.387 ; 80.874,102.464 81.407,102.464 ; 80.874,102.54 81.407,102.54 ; 80.874,102.616 81.407,102.616 ; 80.874,102.692 81.407,102.692 ; 80.874,102.768 81.407,102.768 ; 80.874,102.845 81.407,102.845 ; 80.874,102.921 81.483,102.921 ; 80.874,103.378 81.483,103.378 ; 80.874,103.759 83.541,103.759 ; 80.874,103.835 83.388,103.835 ; 80.874,103.911 83.388,103.911 ; 80.874,103.988 83.388,103.988 ; 80.874,104.064 84.607,104.064 ; 80.874,104.14 84.607,104.14 ; 80.874,104.216 81.407,104.216 ; 80.874,104.292 81.407,104.292 ; 80.874,104.369 81.483,104.369 ; 80.874,104.445 81.483,104.445 ; 80.874,107.798 81.712,107.798 ; 80.95,102.006 81.788,102.006 ; 80.95,102.083 81.712,102.083 ; 80.95,102.159 81.559,102.159 ; 80.95,103.454 81.331,103.454 ; 80.95,104.521 81.559,104.521 ; 80.95,104.597 81.712,104.597 ; 81.026,101.93 81.94,101.93 ; 81.026,104.673 81.788,104.673 ; 81.026,104.75 81.94,104.75 ; 81.026,107.874 81.864,107.874 ; 81.102,101.854 82.017,101.854 ; 81.102,104.826 82.093,104.826 ; 81.178,101.778 82.169,101.778 ; 81.178,104.902 82.169,104.902 ; 81.255,101.702 82.321,101.702 ; 81.255,103.073 81.483,103.073 ; 81.255,103.149 81.559,103.149 ; 81.255,103.226 81.483,103.226 ; 81.255,107.95 82.169,107.95 ; 81.331,104.978 82.321,104.978 ; 81.331,108.026 82.55,108.026 ; 81.407,101.625 82.474,101.625 ; 81.407,105.054 82.474,105.054 ; 81.559,101.549 82.55,101.549 ; 81.559,105.131 82.626,105.131 ; 81.559,108.102 83.16,108.102 ; 81.636,101.473 82.702,101.473 ; 81.636,105.207 82.702,105.207 ; 81.788,101.397 82.855,101.397 ; 81.788,105.283 82.855,105.283 ; 81.788,108.179 84.76,108.179 ; 81.94,101.321 82.931,101.321 ; 81.94,105.359 83.007,105.359 ; 82.017,102.159 83.312,102.159 ; 82.017,102.235 83.388,102.235 ; 82.017,102.311 82.245,102.311 ; 82.017,102.387 82.245,102.387 ; 82.017,102.464 83.388,102.464 ; 82.017,102.54 85.827,102.54 ; 82.017,102.997 83.464,102.997 ; 82.017,103.073 82.245,103.073 ; 82.017,103.149 82.245,103.149 ; 82.017,103.226 82.245,103.226 ; 82.017,103.302 83.312,103.302 ; 82.017,108.255 84.531,108.255 ; 82.093,101.244 83.083,101.244 ; 82.093,102.083 82.55,102.083 ; 82.093,102.616 82.626,102.616 ; 82.093,102.921 85.75,102.921 ; 82.093,103.378 83.236,103.378 ; 82.093,105.435 83.083,105.435 ; 82.169,102.692 82.55,102.692 ; 82.169,102.845 82.55,102.845 ; 82.169,103.454 82.474,103.454 ; 82.245,101.168 84.455,101.168 ; 82.245,102.006 82.398,102.006 ; 82.245,105.512 84.455,105.512 ; 82.321,101.092 84.379,101.092 ; 82.321,105.588 84.303,105.588 ; 82.398,108.331 84.15,108.331 ; 82.474,101.016 84.226,101.016 ; 82.474,102.311 83.388,102.311 ; 82.474,102.387 83.388,102.387 ; 82.474,103.073 83.388,103.073 ; 82.474,103.149 83.388,103.149 ; 82.474,103.226 83.312,103.226 ; 82.474,105.664 84.15,105.664 ; 82.55,98.654 83.16,98.654 ; 82.55,98.73 82.702,98.73 ; 82.55,98.806 82.702,98.806 ; 82.55,98.882 82.931,98.882 ; 82.626,98.577 83.16,98.577 ; 82.626,98.958 83.083,98.958 ; 82.626,99.263 82.779,99.263 ; 82.626,99.339 83.16,99.339 ; 82.626,99.416 83.16,99.416 ; 82.626,100.94 84.074,100.94 ; 82.626,105.74 83.998,105.74 ; 82.702,98.501 83.083,98.501 ; 82.702,99.035 83.16,99.035 ; 82.702,100.863 83.998,100.863 ; 82.702,105.816 83.922,105.816 ; 82.855,100.787 83.845,100.787 ; 82.855,105.893 83.769,105.893 ; 82.931,99.111 83.236,99.111 ; 83.007,98.73 83.16,98.73 ; 83.007,99.187 83.236,99.187 ; 83.007,99.263 83.236,99.263 ; 83.007,100.711 83.693,100.711 ; 83.083,105.969 83.617,105.969 ; 83.16,103.683 84.607,103.683 ; 83.236,102.616 85.827,102.616 ; 83.236,102.768 85.827,102.768 ; 83.236,102.845 85.827,102.845 ; 83.236,103.53 84.226,103.53 ; 83.236,103.607 84.226,103.607 ; 83.236,104.216 84.226,104.216 ; 83.312,98.73 83.541,98.73 ; 83.312,98.806 83.541,98.806 ; 83.312,98.882 83.541,98.882 ; 83.312,98.958 83.541,98.958 ; 83.312,99.035 83.541,99.035 ; 83.312,99.111 83.541,99.111 ; 83.312,99.187 83.541,99.187 ; 83.312,99.263 83.464,99.263 ; 83.312,99.339 83.464,99.339 ; 83.312,99.416 83.464,99.416 ; 83.312,102.692 85.827,102.692 ; 83.312,103.378 84.684,103.378 ; 83.312,103.454 84.226,103.454 ; 83.312,104.292 84.226,104.292 ; 83.312,104.369 84.226,104.369 ; 83.312,104.445 84.684,104.445 ; 83.388,98.577 84.074,98.577 ; 83.388,98.654 83.617,98.654 ; 83.388,103.302 84.607,103.302 ; 83.388,104.521 84.607,104.521 ; 83.464,98.501 83.998,98.501 ; 83.541,101.244 84.607,101.244 ; 83.541,105.435 84.607,105.435 ; 83.617,105.359 84.684,105.359 ; 83.693,101.321 84.76,101.321 ; 83.769,108.102 84.988,108.102 ; 83.845,98.654 84.074,98.654 ; 83.845,99.187 84.074,99.187 ; 83.845,99.263 84.074,99.263 ; 83.845,99.339 84.074,99.339 ; 83.845,99.416 84.074,99.416 ; 83.845,101.397 84.912,101.397 ; 83.845,105.283 84.836,105.283 ; 83.922,98.73 84.15,98.73 ; 83.922,98.806 84.15,98.806 ; 83.922,98.882 84.15,98.882 ; 83.922,98.958 84.15,98.958 ; 83.922,99.035 84.15,99.035 ; 83.922,99.111 84.074,99.111 ; 83.922,101.473 84.988,101.473 ; 83.922,105.207 84.988,105.207 ; 83.998,103.759 84.607,103.759 ; 84.074,101.549 85.141,101.549 ; 84.074,103.835 84.531,103.835 ; 84.074,103.988 84.531,103.988 ; 84.074,104.597 84.531,104.597 ; 84.074,105.131 85.141,105.131 ; 84.15,99.416 84.684,99.416 ; 84.15,99.492 84.912,99.492 ; 84.15,103.226 84.531,103.226 ; 84.15,108.026 85.141,108.026 ; 84.226,99.339 84.303,99.339 ; 84.226,101.625 85.293,101.625 ; 84.226,105.054 85.217,105.054 ; 84.379,99.568 84.912,99.568 ; 84.379,101.702 85.369,101.702 ; 84.379,103.607 84.684,103.607 ; 84.379,104.216 84.684,104.216 ; 84.379,104.978 85.369,104.978 ; 84.455,99.339 84.684,99.339 ; 84.455,103.454 84.684,103.454 ; 84.455,103.53 84.684,103.53 ; 84.455,104.292 84.684,104.292 ; 84.455,104.369 84.684,104.369 ; 84.455,104.902 85.446,104.902 ; 84.531,98.882 84.836,98.882 ; 84.531,98.958 84.76,98.958 ; 84.531,99.035 84.76,99.035 ; 84.531,99.111 84.76,99.111 ; 84.531,99.187 84.76,99.187 ; 84.531,99.263 84.684,99.263 ; 84.531,101.778 85.522,101.778 ; 84.531,107.95 85.293,107.95 ; 84.607,98.654 84.836,98.654 ; 84.607,98.73 84.836,98.73 ; 84.607,98.806 84.836,98.806 ; 84.607,101.854 85.598,101.854 ; 84.607,104.826 85.522,104.826 ; 84.684,99.644 84.912,99.644 ; 84.684,104.75 85.598,104.75 ; 84.76,101.93 85.598,101.93 ; 84.836,104.673 85.674,104.673 ; 84.836,107.874 85.522,107.874 ; 84.912,102.006 85.674,102.006 ; 84.988,102.083 85.674,102.083 ; 84.988,104.597 85.674,104.597 ; 84.988,107.798 85.674,107.798 ; 85.065,99.492 85.293,99.492 ; 85.065,99.568 85.293,99.568 ; 85.065,99.644 85.598,99.644 ; 85.065,99.72 85.522,99.72 ; 85.065,99.797 85.369,99.797 ; 85.065,99.873 85.293,99.873 ; 85.141,98.882 85.293,98.882 ; 85.141,98.958 85.293,98.958 ; 85.141,99.035 85.293,99.035 ; 85.141,99.111 85.369,99.111 ; 85.141,99.187 85.446,99.187 ; 85.141,99.263 85.598,99.263 ; 85.141,99.339 85.293,99.339 ; 85.141,99.416 85.293,99.416 ; 85.141,102.159 85.75,102.159 ; 85.141,103.454 85.446,103.454 ; 85.141,103.53 85.369,103.53 ; 85.141,103.607 85.446,103.607 ; 85.141,104.521 85.75,104.521 ; 85.217,102.235 85.75,102.235 ; 85.217,102.311 85.75,102.311 ; 85.217,102.387 85.75,102.387 ; 85.217,102.464 85.827,102.464 ; 85.217,103.302 85.827,103.302 ; 85.217,103.378 85.827,103.378 ; 85.217,103.683 85.827,103.683 ; 85.217,103.759 85.827,103.759 ; 85.217,103.835 85.827,103.835 ; 85.217,103.911 85.827,103.911 ; 85.217,103.988 85.827,103.988 ; 85.217,104.064 85.827,104.064 ; 85.217,104.14 85.75,104.14 ; 85.217,104.216 85.75,104.216 ; 85.217,104.292 85.75,104.292 ; 85.217,104.369 85.75,104.369 ; 85.217,104.445 85.75,104.445 ; 85.217,107.721 85.75,107.721 ; 85.369,99.339 85.979,99.339 ; 85.369,99.568 85.75,99.568 ; 85.369,103.226 85.674,103.226 ; 85.369,107.645 85.903,107.645 ; 85.522,99.416 85.903,99.416 ; 85.522,99.492 85.827,99.492 ; 85.522,107.569 86.055,107.569 ; 85.598,100.025 85.827,100.025 ; 85.598,100.101 85.827,100.101 ; 85.598,103.454 85.903,103.454 ; 85.598,103.53 85.903,103.53 ; 85.598,103.607 85.903,103.607 ; 85.674,99.873 86.284,99.873 ; 85.674,99.949 85.903,99.949 ; 85.674,100.178 85.903,100.178 ; 85.674,100.254 85.979,100.254 ; 85.674,107.493 86.131,107.493 ; 85.75,99.263 85.979,99.263 ; 85.75,99.797 86.284,99.797 ; 85.75,100.33 86.284,100.33 ; 85.75,107.417 86.208,107.417 ; 85.827,100.406 86.208,100.406 ; 85.903,99.72 86.284,99.72 ; 85.903,107.34 86.284,107.34 ; 85.979,100.482 86.131,100.482 ; 86.055,99.416 86.284,99.416 ; 86.055,99.492 86.284,99.492 ; 86.055,99.568 86.284,99.568 ; 86.055,99.644 86.284,99.644 ; 86.055,100.254 86.36,100.254 ; 86.055,107.264 86.436,107.264 ; 86.131,99.949 86.589,99.949 ; 86.131,100.178 86.436,100.178 ; 86.131,107.188 86.512,107.188 ; 86.208,100.025 86.512,100.025 ; 86.208,100.101 86.512,100.101 ; 86.208,100.635 86.512,100.635 ; 86.208,100.711 86.436,100.711 ; 86.208,107.112 86.589,107.112 ; 86.284,100.559 86.665,100.559 ; 86.284,107.036 86.665,107.036 ; 86.36,100.482 86.741,100.482 ; 86.36,106.959 86.741,106.959 ; 86.436,99.873 86.665,99.873 ; 86.436,106.883 86.817,106.883 ; 86.512,99.797 86.665,99.797 ; 86.512,100.406 86.817,100.406 ; 86.589,100.33 87.198,100.33 ; 86.589,101.092 86.893,101.092 ; 86.589,101.168 86.817,101.168 ; 86.589,101.244 86.741,101.244 ; 86.589,106.807 86.893,106.807 ; 86.665,100.254 87.122,100.254 ; 86.665,106.731 86.97,106.731 ; 86.741,101.016 87.046,101.016 ; 86.741,101.397 87.351,101.397 ; 86.741,101.473 86.97,101.473 ; 86.741,101.549 86.817,101.549 ; 86.741,106.655 87.046,106.655 ; 86.817,100.94 87.122,100.94 ; 86.817,101.321 87.351,101.321 ; 86.817,106.578 87.122,106.578 ; 86.893,100.863 87.198,100.863 ; 86.893,106.502 87.198,106.502 ; 86.97,100.406 87.274,100.406 ; 86.97,106.426 87.198,106.426 ; 87.046,100.482 87.274,100.482 ; 87.046,100.711 87.351,100.711 ; 87.046,100.787 87.274,100.787 ; 87.046,101.244 87.427,101.244 ; 87.046,102.006 87.351,102.006 ; 87.046,102.083 87.198,102.083 ; 87.046,106.274 87.351,106.274 ; 87.046,106.35 87.274,106.35 ; 87.122,100.559 87.351,100.559 ; 87.122,100.635 87.351,100.635 ; 87.122,101.168 87.579,101.168 ; 87.122,101.93 87.503,101.93 ; 87.122,102.616 87.96,102.616 ; 87.122,106.197 87.351,106.197 ; 87.198,101.473 87.427,101.473 ; 87.198,101.549 87.427,101.549 ; 87.198,101.854 87.655,101.854 ; 87.198,102.54 87.503,102.54 ; 87.198,102.692 88.189,102.692 ; 87.198,106.045 87.503,106.045 ; 87.198,106.121 87.427,106.121 ; 87.274,101.092 87.579,101.092 ; 87.274,101.625 87.503,101.625 ; 87.274,101.702 87.96,101.702 ; 87.274,102.464 87.579,102.464 ; 87.274,105.969 87.503,105.969 ; 87.351,101.778 87.732,101.778 ; 87.351,102.387 87.655,102.387 ; 87.351,105.816 87.579,105.816 ; 87.351,105.893 87.579,105.893 ; 87.427,101.016 87.579,101.016 ; 87.427,102.311 87.884,102.311 ; 87.427,105.664 87.655,105.664 ; 87.427,105.74 87.655,105.74 ; 87.503,102.235 87.884,102.235 ; 87.503,105.512 87.808,105.512 ; 87.503,105.588 87.732,105.588 ; 87.579,102.768 88.189,102.768 ; 87.579,105.359 87.808,105.359 ; 87.579,105.435 87.808,105.435 ; 87.655,101.625 87.96,101.625 ; 87.655,102.159 87.96,102.159 ; 87.655,105.131 87.884,105.131 ; 87.655,105.207 87.884,105.207 ; 87.655,105.283 87.884,105.283 ; 87.732,101.549 87.884,101.549 ; 87.732,102.083 88.036,102.083 ; 87.732,102.387 87.96,102.387 ; 87.732,102.464 87.96,102.464 ; 87.732,102.54 87.96,102.54 ; 87.732,104.902 88.036,104.902 ; 87.732,104.978 87.96,104.978 ; 87.732,105.054 87.96,105.054 ; 87.808,102.006 88.036,102.006 ; 87.808,104.673 88.036,104.673 ; 87.808,104.75 88.036,104.75 ; 87.808,104.826 88.036,104.826 ; 87.884,101.93 87.96,101.93 ; 87.884,104.369 88.113,104.369 ; 87.884,104.445 88.113,104.445 ; 87.884,104.521 88.113,104.521 ; 87.884,104.597 88.113,104.597 ; 87.96,102.845 88.265,102.845 ; 87.96,103.835 88.189,103.835 ; 87.96,103.911 88.189,103.911 ; 87.96,103.988 88.189,103.988 ; 87.96,104.064 88.189,104.064 ; 87.96,104.14 88.189,104.14 ; 87.96,104.216 88.189,104.216 ; 87.96,104.292 88.113,104.292 ; 88.036,103.454 88.265,103.454 ; 88.036,103.53 88.265,103.53 ; 88.036,103.607 88.265,103.607 ; 88.036,103.683 88.265,103.683 ; 88.036,103.759 88.265,103.759 ; 88.113,103.378 88.265,103.378

## Polygon pours and split planes (outlines as drawn)
GND on Top Layer "GND_L01_P048" (solid, pour order 48): 135.255,64.008 135.382,65.039 138.43,67.564 138.43,99.933 135.382,102.997 135.382,114.935 134.366,116.078 70.358,116.078 ccw(c70.358,115.158) 69.708,115.809 69.596,115.697 ccw(c70.209,115.084) 69.342,115.084 69.342,63.478 ccw(c70.209,63.478) 69.596,62.865 69.618,62.843 ccw(c70.485,63.71) 70.485,62.484 134.029,62.484 ccw(c134.029,64.218) 135.255,62.992 ccw(c134.948,63.299) 135.382,63.299 135.382,65.024
GND on Top Layer "GND_L01_P034" (hatched 45Degree grid 0.708 track 0.4, pour order 34): 108.355,116.078
GND on Top Layer "Top Layer-GND 2" (hatched 45Degree grid 0.508 track 0.254, pour order 14): 145.923,63.881
GND on Top Layer "Top Layer-GND 1" (hatched 45Degree grid 0.508 track 0.303, remove dead copper, pour order 2): 71.683,113.157
GND on Bottom Layer "GND_L02_P052" (hatched 45Degree grid 0.7 track 0.3, pour order 52): 134.366,62.484 ccw(c134.366,63.404) 135.016,62.753 135.382,63.119 135.382,65.024 138.43,67.564 138.43,99.949 135.509,102.972 135.382,114.935 134.239,116.078 70.231,116.078 ccw(c70.231,115.189) 69.342,115.189 69.342,63.5 ccw(c70.358,63.5) 70.358,62.484